# Altium PCB CYUSB.PcbDoc (part 2 of 2)
Units mm, origin at the board's own origin, x right, y up, seen from the top; angles counter-clockwise.
Board outline 36.49 x 50.37 mm, 4 copper layers (Top Layer, Internal Plane 1, Signal Layer 1, Bottom Layer), stack 0.778 mm thick; 127 components, 177 nets, 911 pads, 528 vias.
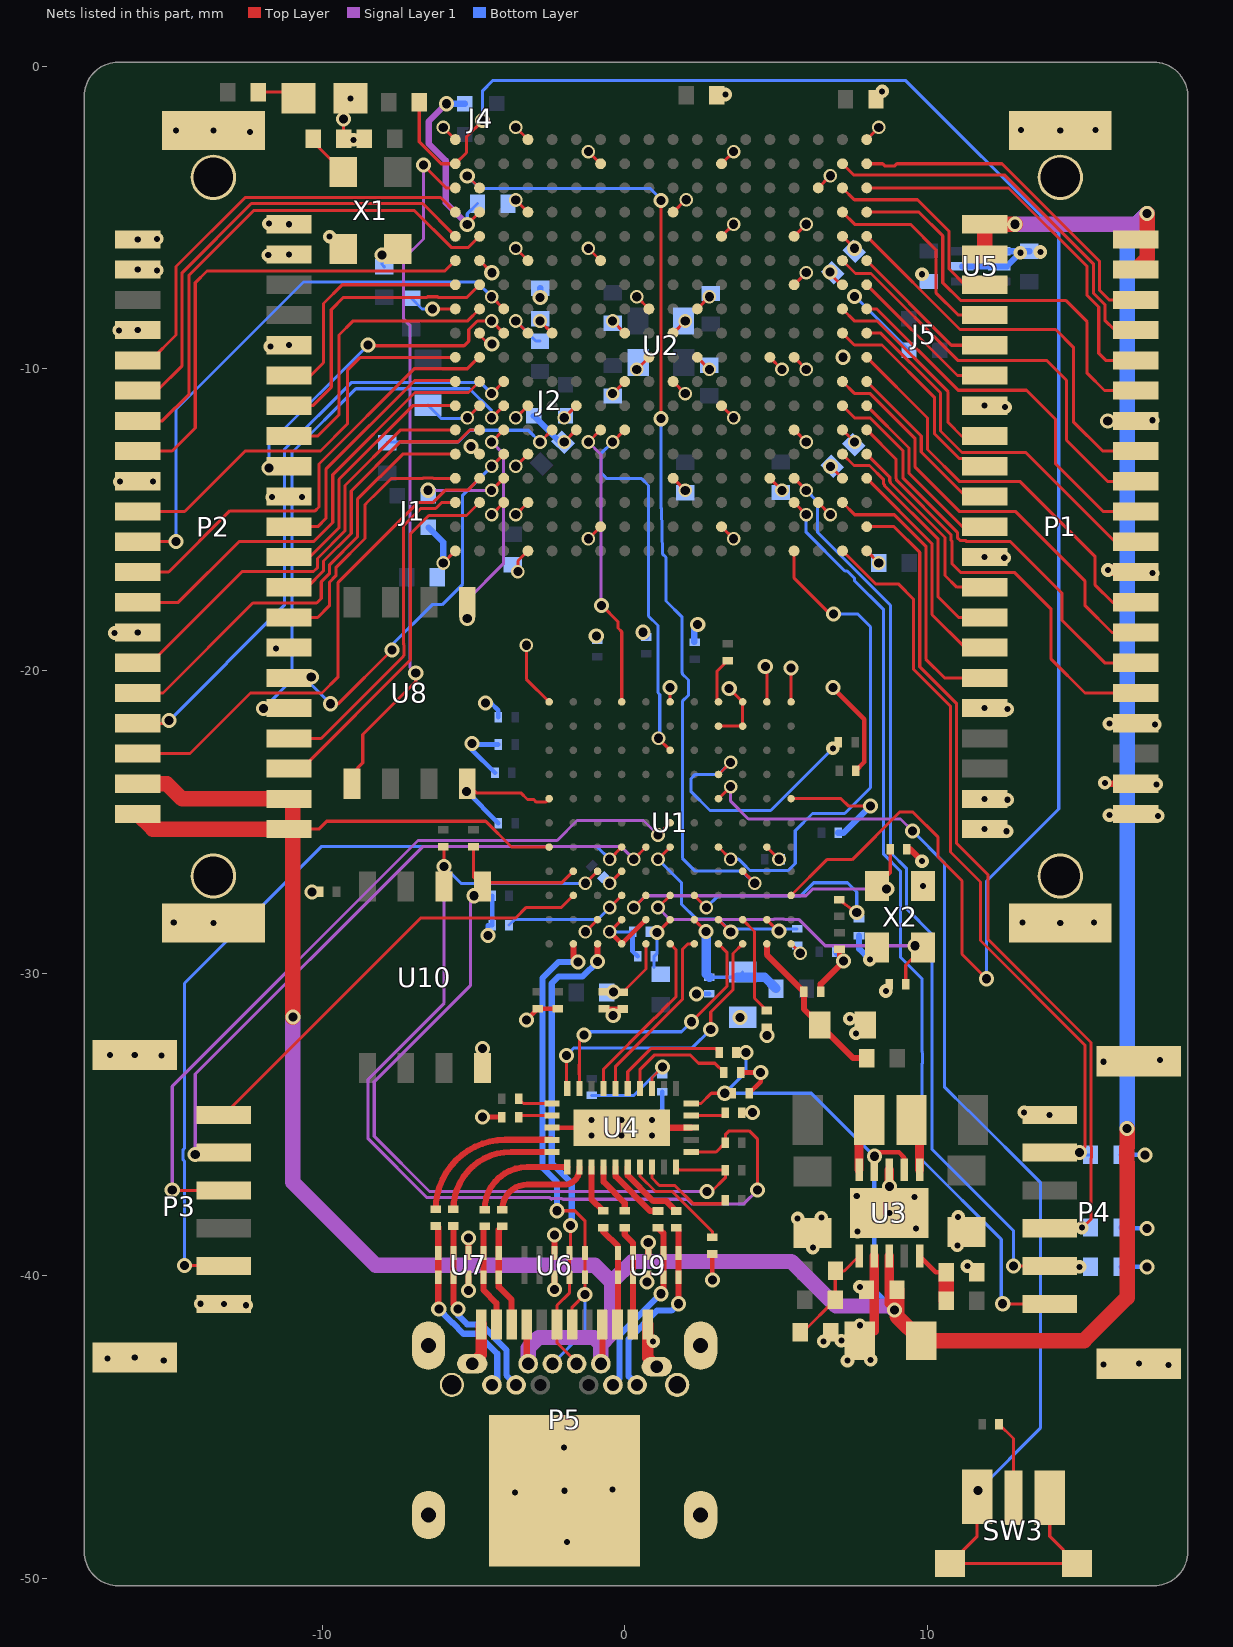
[diagram p4: the nets of this part, all layers, seen from the top]

## Via types
v1: diameter 0.45, hole 0.305, Top Layer to Bottom Layer, 248 vias
v2: diameter 0.5, hole 0.3, Top Layer to Bottom Layer, 169 vias
v3: diameter 0.45, hole 0.2, Top Layer to Bottom Layer, 111 vias

## Nets (pads, with @x,y where several pads share a name; then routed paths per layer and width w, separated by ;. In a path a pad name is that pad's centre, name@x,y a point inside that pad or via, vN(x,y) a via of type N, cw(c..) or ccw(c..) an arc to the next point about the centre after c; other vN are vias at no path point) (continued)
DQ31: U1.E4 U2.D18 | length 16.5
  Top Layer w0.102: U1.E4@3.1,-25.821 v1(3.5,-26.221) ; U2.D18@5.6,-16.029 5.6,-16.93 6.78,-18.11 v2(6.909,-18.11)
  Bottom Layer w0.102: v1(3.5,-26.221) 3.768,-26.221 3.923,-26.376 ; 3.923,-26.378 4.144,-26.599 5.405,-26.599 5.639,-26.365 5.639,-25.281 6.206,-24.714 7.271,-24.714 8.128,-23.857 8.128,-18.542 7.696,-18.11 v2(6.909,-18.11)
FLASH_CS: U2.V3 U8.1 | length 23.1
  Top Layer w0.102: U8.1@-9.017,-23.726 -9.017,-23.393 -8.661,-23.038 -8.661,-22.098 -6.909,-20.345 v2(-6.909,-20.066) ; v2(-6.655,-3.277) -5.902,-4.029 U2.V3@-5.6,-4.029
  Signal Layer 1 w0.102: v2(-6.909,-20.066) -7.106,-19.869 -7.106,-8.566 -7.315,-8.357 -7.315,-6.375 -6.655,-5.715 v2(-6.655,-3.277)
FLASH_DI: U2.T13 U8.5 | length 7.1
  Top Layer w0.102: v1(-4.4,-12.429) U2.T13@-4,-12.029
  Signal Layer 1 w0.102: v2(-5.207,-18.263) -5.207,-17.653 -4.013,-16.459 -4.013,-12.816 v1(-4.4,-12.429)
GND: C1.1 C10.2 C12.1 C13.1 C14.1 C15.1 C16.1 C17.1 C18.1 C19.1 C20.1 C21.1 C22.1 C23.1 C24.1 C25.1 C26.1 C27.1 C28.1 C29.1 C30.1 C31.1 C32.1 C33.1 C34.1 C35.1 C36.1 C37.1 C38.1 C39.1 C40.1 C41.2 C53.1 C54.1 C55.1 C56.1 C68.1 C71.2 C76.2 C79.2 C81.2 C87.2 C88.2 C89.2 C90.2 C91.2 C92.2 C93.2 C94.2 C95.2 C96.2 C97.2 C98.2 C99.2 C100.2 C101.2 J1.3 J2.3 LED1.2 P1.0 P1.7 P1.12 P1.17 P1.20 P1.21 P1.22 P1.23 P1.25 P1.30 P1.35 P2.0 P2.7 P2.12 P2.17 P2.20 P2.21 P2.22 P2.23 P2.25 P2.30 P2.35 P3.0 P3.6 P4.0 P4.6 P5.0 P5.1 P5.12 P5.B1 P5.B12 R2.2 R3.2 R6.1 R7.1 R8.1 R9.1 R12.2 R14.2 R15.2 R16.2 R19.2 R24.1 R33.2 R89.2 U1.A1 U1.A8 U1.B7 U1.B8 U1.B9 U1.D8 U1.E2 U1.G1 U1.G11 U1.K3 U1.K4 U1.L1 U1.L2 U1.L3 U1.L6 U1.L11 U2.A1 U2.A18 U2.B7 U2.B13 U2.C3 U2.C16 U2.D5 U2.D10 U2.E15 U2.G2 U2.G5 U2.G12 U2.G17 U2.H8 U2.H10 U2.J4 U2.J9 U2.J11 U2.J15 U2.K8 U2.K10 U2.L9 U2.L11 U2.M2 U2.M6 U2.M17 U2.N13 U2.R1 U2.R4 U2.R9 U2.R14 U2.R16 U2.R18 U2.T16 U2.U6 U2.U12 U2.V1 U2.V18 U3.2 U3.8 U3.11 U4.0 U4.13 U4.28 U5.2 U5.4 U5.5 U6.3 U6.8 U7.3 U7.8 U8.4 U9.3 U9.8 U10.4 X1.2 X2.2 X2.4 | length 92.7
  Top Layer w0.102: R89.2@-9.292,-2.4 v2(-9.292,-1.753) -9.292,-1.291 v3(-9.068,-1.067) ; v1(-6,-16.429) U2.V18@-5.6,-16.029 ; v1(-6,-2.029) U2.V1@-5.6,-2.429 ; U8.4@-5.207,-23.726 -4.905,-24.028 -3.439,-24.028 -3.216,-24.251 -3.007,-24.251 -2.921,-24.337 -2.614,-24.337 U1.G11@-2.498,-24.222 ; v1(-5.2,-11.629) U2.U12@-4.8,-11.229 ; U2.U6@-4.8,-6.429 -4.798,-6.429 v2(-4.394,-6.833) ; v1(-4.4,-14.829) U2.T16@-4,-14.429 ; v1(-3.6,-14.829) U2.R16@-3.2,-14.429 ; v1(-3.6,-13.229) U2.R14@-3.2,-12.829 ; v1(-3.6,-8.429) U2.R9@-3.2,-8.829 ; v1(-3.6,-4.429) U2.R4@-3.2,-4.829 ; v1(-3.6,-2.029) U2.R1@-3.2,-2.429 ; v1(-3.531,-16.713) -3.531,-16.36 U2.R18@-3.2,-16.029 ; v1(-3.251,-19.152) -3.251,-20.269 U1.L11@-2.498,-21.022 ; v1(-2,-12.429) U2.N13@-1.6,-12.029 ; v1(-1.299,-28.621) U1.B9@-0.899,-28.221 ; v1(-1.2,-15.629) U2.M17@-0.8,-15.229 ; v1(-1.2,-6.029) U2.M6@-0.8,-6.429 ; v1(-1.2,-2.829) U2.M2@-0.8,-3.229 ; v1(-0.499,-28.621) U1.B8@-0.099,-28.221 ; v1(-0.499,-27.021) U1.D8@-0.099,-26.621 ; v1(-0.4,-10.829) U2.L11@0,-10.429 ; v1(-0.4,-8.429) U2.L9@0,-8.829 ; v1(0.4,-10.029) U2.K10@0.8,-9.629 ; v1(0.4,-7.629) U2.K8@0.8,-8.029 ; U1.L6@1.501,-21.022 v2(1.501,-20.551) ; U2.J15@1.6,-13.629 v1(2,-14.029) ; U2.J11@1.6,-10.429 v1(2,-10.829) ; U2.J9@1.6,-8.829 v1(2,-8.429) ; U2.J4@1.6,-4.829 2.009,-4.42 v1(2.032,-4.42) ; U2.H10@2.4,-9.629 v1(2.8,-10.029) ; U2.H8@2.4,-8.029 v1(2.8,-7.629) ; U1.K4@3.1,-21.822 U1.K3@3.9,-21.822 U1.L3@3.9,-21.022 ; U2.G17@3.2,-15.229 v1(3.6,-15.629) ; U2.G12@3.2,-11.229 v1(3.6,-11.629) ; U2.G5@3.2,-5.629 v1(3.6,-5.229) ; U2.G2@3.2,-3.229 v1(3.6,-2.829) ; v2(3.454,-20.576) U1.L3@3.9,-21.022 ; U1.L3@3.922,-21 U1.L3@3.9,-21.022 ; v2(4.648,-19.848) 4.7,-19.9 U1.L2@4.7,-21.022 U1.L2@4.722,-21 ; U1.E2@4.7,-25.821 v1(5.1,-26.221) ; U2.E15@4.8,-13.629 v1(5.2,-14.029) ; U1.A1@5.5,-29.021 v1@5.908,-29.429 ; U1.G1@5.5,-24.222 7.153,-24.222 7.391,-24.46 v2(8.128,-24.46) ; v2(5.5,-19.9) U1.L1@5.5,-21.022 U1.L1@5.522,-21 ; U2.D10@5.6,-9.629 v1(6,-10.029) ; U2.D5@5.6,-5.629 v1(6,-5.229) ; v1(5.8,-29.329) v1@5.808,-29.329 ; U2.C16@6.4,-14.429 v1(6.8,-14.829) ; U2.C3@6.4,-4.029 v1(6.8,-3.629) ; v2(6.782,-6.807) 6.782,-6.858 7.153,-7.229 U2.B7@7.2,-7.229 ; U2.B13@7.2,-12.029 v1(7.6,-12.429) ; U2.A18@8,-16.029 v1(8.4,-16.429) ; U2.A1@8,-2.429 v1(8.4,-2.029) ; v2(15.971,-11.729) P1.35@16.9,-11.729
  Top Layer w0.152: v2(-4.699,-34.747) R8.1@-4.06,-34.747 ; U10.4@-4.699,-33.124 v2(-4.699,-32.487) ; v2(-3.251,-31.542) C19.1@-2.87,-31.161 C28.1@-2.21,-31.161 ; U4.13@-2.4,-35.1 U4.0@-0.1,-35.1 ; C30.1@-0.686,-31.161 v2@-0.381,-31.161 ; v1(-0.499,-28.621) U1.A8@-0.099,-29.021 U1.B7@0.701,-28.221 ; v2(-0.381,-31.394) v2@-0.381,-31.161 ; C29.1@-0.083,-31.161 v2@-0.381,-31.161 ; v2(2.9,-40.136) R6.1@2.9,-39.275 ; R7.1@3.831,-33.274 v2(4.496,-33.274) 4.496,-33.574 C13.1@4.11,-33.96 ; R9.1@3.875,-34.6 v2(4.222,-34.6) ; v2(4.7,-32.056) R15.2@4.7,-31.775 ; v2(6.883,-20.549) 7.925,-21.59 7.925,-23.008 C16.1@7.641,-23.292 ; v2@7.1,-29.452 C37.1@7.1,-29.204
  Top Layer w0.203: v2(-10.338,-27.305) C12.1@-10.079,-27.305 ; v2(-5.165,-40.479) U7.8@-5.165,-40.04 ; U7.3@-5.165,-39.24 v2(-5.165,-38.744) ; v2(-2.32,-40.445) U6.8@-2.32,-40.04 ; U6.3@-2.32,-39.24 v2(-2.32,-38.65) ; U4.0@-0.1,-35.1 U4.28@2.2,-35.1 ; v2@0.584,-18.694 v2(0.61,-18.72) ; v2(0.732,-40.2) 0.732,-40.09 0.73,-40.089 U9.8@0.779,-40.04 ; U9.3@0.779,-39.24 v2(0.779,-38.896) ; C34.1@6.475,-30.6 6.475,-30.355 v2(7.239,-29.591) ; C10.2@9.328,-25.893 9.434,-25.893 v3(9.83,-26.289) ; v3@15.906,-23.729 P1.23@16.9,-23.729
  Top Layer w0.305: C53.1@8.248,-41.821 U3.2@8.248,-39.344 ; v2(8.748,-37.048) U3.8@8.748,-36.493
  Top Layer w0.381: P5.B12@-5.04,-42.903 -4.74,-42.603 P5.1@-4.74,-41.603 ; P5.12@0.76,-41.603 0.76,-42.703 P5.B1@1.06,-43.003 ; v3(15.977,-16.662) P1.30@16.833,-16.662
  Signal Layer 1 w0.203: v2@0.732,-40.305 v2(0.732,-40.2)
  Bottom Layer w0.102: C71.2@-6.502,-11.215 -6.059,-11.659 -5.23,-11.659 v1(-5.2,-11.629) ; v1(-3.6,-8.429) -2.937,-9.092 C95.2@-2.8,-9.092 ; v1@-0.494,-28.626 C31.1@0.258,-28.626
  Bottom Layer w0.152: v2(-5.232,-23.978) -5.226,-23.978 C17.1@-4.175,-25.029 ; v2@-5.055,-22.602 C35.1@-4.288,-23.368 ; v2(-5.055,-22.403) -5.004,-22.403 -4.978,-22.429 C25.1@-4.175,-22.429 ; v2(-4.597,-21.057) -4.42,-21.057 -4.175,-21.301 C18.1@-4.175,-21.529 ; v2(-4.524,-28.75) -4.524,-28.4 R16.2@-4.375,-28.4 C24.1@-4.375,-27.429 ; C31.1@0.258,-28.626 0.258,-29.262 C32.1@0.425,-29.429 ; v3(0.9,-34.85) 1.245,-34.505 R24.1@1.245,-33.905 ; v2(2.37,-30.675) C39.1@2.8,-30.675 ; v2(3.815,-31.45) C38.1@3.9,-31.45 ; C20.1@6.981,-29.286 6.981,-29.333 v2(7.239,-29.591) ; R2.2@16.408,-39.7 v2(17.272,-39.7) ; R3.2@16.408,-38.4 16.438,-38.43 v2(17.272,-38.43) ; R33.2@16.408,-36 v2(17.204,-36)
  Bottom Layer w0.203: J1.3@-6.491,-15.25 -6,-15.741 v1(-6,-16.429) ; J2.3@-3.006,-11.566 C76.2@-2.143,-12.429 ; v2(-2.794,-7.645) C97.2@-2.794,-7.341 ; v2(-0.94,-18.847) -0.94,-18.953 C36.1@-0.914,-18.978 ; v2(0.61,-18.72) 0.61,-18.775 C15.1@0.711,-18.877 ; C14.1@2.3,-19.043 2.3,-18.531 2.365,-18.466 v2(2.413,-18.466) ; C22.1@7.057,-25.349 7.239,-25.349 v2(8.128,-24.46) ; C40.1@7.747,-28.748 7.747,-29.185 v3(8.103,-29.54) ; U5.2@11.154,-6.622 U5.5@12.379,-6.622 12.631,-6.622 v3(13.081,-6.172) ; U5.4@12.379,-6.122 C26.1@13.38,-6.122
  other v3: -1.905,-48.793 -3.632,-47.168 -1.99,-47.103 -0.406,-47.066 -2.007,-45.669 17.983,-42.951 15.824,-42.926 17,-42.9 -15.24,-42.799 7.366,-42.799 8.128,-42.774 -17.094,-42.723 -16.2,-42.7 0.94,-42.164 6.579,-42.164 7.163,-42.139 7.772,-41.631 -12.522,-40.97 -13.25,-40.925 -14.021,-40.919 7.772,-40.361 11.328,-39.675 6.223,-39.065 10.998,-38.989 7.696,-38.532 9.627,-38.43 5.715,-38.1 6.502,-38.075 11.024,-38.049 8.748,-37.918 9.576,-37.389 7.671,-37.363 -1.1,-35.35 -0.1,-35.35 0.9,-35.35 -1.1,-34.85 -0.1,-34.85 14.05,-34.675 13.208,-34.595 15.824,-32.918 17.704,-32.868 -16.2,-32.7 -15.316,-32.715 -17.018,-32.69 7.645,-31.979 7.442,-31.496 8.636,-30.582 -13.6,-28.329 14.4,-28.329 -14.91,-28.321 13.157,-28.321 15.519,-28.321 9.866,-27.112 12.624,-25.298 11.9,-25.229 17.628,-24.79 16.027,-24.765 12.649,-24.257 11.9,-24.229 17.577,-23.749 15.875,-23.698 17.526,-21.768 16.027,-21.742 12.649,-21.26 11.9,-21.229 -11.532,-19.253 -16.866,-18.745 -16.1,-18.729 17.45,-16.764 12.548,-16.256 11.9,-16.229 -11.659,-14.249 -10.668,-14.249 -16.688,-13.741 -15.596,-13.741 17.45,-11.709 12.573,-11.278 11.9,-11.229 -11.709,-9.271 -11.1,-9.229 -16.713,-8.738 -16.1,-8.729 9.83,-6.883 -15.469,-6.756 -16.1,-6.729 -11.786,-6.248 -11.1,-6.229 13.741,-6.147 -16.1,-5.729 -15.469,-5.715 -9.754,-5.639 -11.1,-5.229 -11.76,-5.207 -8.966,-2.438 -12.395,-2.184 -14.834,-2.134 -13.6,-2.129 14.4,-2.129 13.106,-2.108 15.57,-2.108 3.327,-0.94 8.509,-0.838
IA0: P1.3 U2.B3 | length 6.8
  Top Layer w0.102: U2.B3@7.2,-4.029 7.591,-4.42 9.677,-4.42 10.719,-5.461 10.719,-6.706 11.242,-7.229 P1.3@11.9,-7.229
IA1: P1.39 U2.A2 | length 11.4
  Top Layer w0.102: U2.A2@8,-3.229 8.527,-3.229 8.596,-3.298 8.93,-3.298 8.999,-3.229 12.475,-3.229 15.697,-6.452 15.697,-7.417 16.009,-7.729 P1.39@16.9,-7.729
IA2: P1.4 U2.B4 | length 6.9
  Top Layer w0.102: U2.B4@7.2,-4.829 7.603,-5.232 9.449,-5.232 10.287,-6.071 10.287,-7.493 11.023,-8.229 P1.4@11.9,-8.229
IA3: P1.38 U2.B2 | length 12.9
  Top Layer w0.102: U2.B2@7.2,-3.229 7.578,-3.607 12.565,-3.607 15.494,-6.536 15.494,-7.501 15.875,-7.882 15.875,-8.407 16.197,-8.729 P1.38@16.9,-8.729
IA4: P1.5 U2.A6 | length 5.1
  Top Layer w0.102: U2.A6@8,-6.429 10.8,-9.229 P1.5@11.9,-9.229
IA5: P1.37 U2.A3 | length 12.7
  Top Layer w0.102: U2.A3@8,-4.029 12.69,-4.029 15.291,-6.629 15.291,-7.585 15.672,-7.966 15.672,-9.5 15.901,-9.729 P1.37@16.9,-9.729
IA6: P1.6 U2.A7 | length 5.1
  Top Layer w0.102: U2.A7@8,-7.229 11,-10.229 P1.6@11.9,-10.229
IA7: P1.36 U2.A4 | length 13.2
  Top Layer w0.102: U2.A4@8,-4.829 9.731,-4.829 10.516,-5.613 10.516,-7.163 11.1,-7.747 14.58,-7.747 15.291,-8.458 15.291,-10.16 15.86,-10.729 P1.36@16.9,-10.729
IA8: P1.8 U2.B8 | length 7
  Top Layer w0.102: U2.B8@7.2,-8.029 7.604,-8.433 8.357,-8.433 10.693,-10.77 10.693,-11.786 11.137,-12.229 P1.8@11.9,-12.229
IA9: P1.34 U2.A5 | length 13.3
  Top Layer w0.102: U2.A5@8,-5.629 11.083,-8.712 14.249,-8.712 14.834,-9.296 14.834,-11.76 15.802,-12.729 P1.34@16.9,-12.729
IA10: P1.9 U2.B9 | length 7.1
  Top Layer w0.102: U2.B9@7.2,-8.829 7.591,-9.22 8.509,-9.22 10.236,-10.947 10.236,-12.149 11.066,-12.979 P1.9@11.9,-12.979
IA11: P1.33 U2.B6 | length 13.9
  Top Layer w0.102: U2.B6@7.2,-6.429 7.629,-6.858 8.142,-6.858 11.012,-9.728 13.945,-9.728 14.605,-10.389 14.605,-12.37 15.964,-13.729 P1.33@16.9,-13.729
IA12: P1.10 U2.A11 | length 5.7
  Top Layer w0.102: U2.A11@8,-10.429 9.804,-12.233 9.804,-12.759 11.275,-14.229 P1.10@11.8,-14.229
IA13: P1.32 U2.A8 | length 12.5
  Top Layer w0.102: U2.A8@8,-8.029 8.334,-8.029 11.024,-10.719 13.284,-10.719 14.249,-11.684 14.249,-13.157 15.821,-14.729 P1.32@16.9,-14.729
IA14: P1.11 U2.A12 | length 5.3
  Top Layer w0.102: U2.A12@8,-11.229 9.398,-12.627 9.398,-13.462 P1.11@11.165,-15.229
IA15: P1.31 U2.A9 | length 11.8
  Top Layer w0.102: U2.A9@8,-8.829 8.465,-8.829 10.439,-10.803 10.439,-12.065 11.151,-12.776 13.259,-12.776 P1.31@16.212,-15.729
IA16: P1.13 U2.A14 | length 6.6
  Top Layer w0.102: U2.A14@8,-12.829 8.763,-13.592 8.763,-13.724 8.788,-13.749 8.788,-13.783 10.591,-15.586 10.591,-15.76 ; 10.592,-15.761 10.592,-16.84 10.981,-17.229 P1.13@11.9,-17.229
IA17: P1.29 U2.A10 | length 13.4
  Top Layer w0.102: U2.A10@8,-9.629 10.008,-11.637 10.008,-12.675 11.074,-13.741 13.081,-13.741 15.545,-16.205 15.545,-17.145 16.129,-17.729 P1.29@16.9,-17.729
IA18: P1.14 U2.B14 | length 8.2
  Top Layer w0.102: U2.B14@7.2,-12.829 7.579,-13.208 8.092,-13.208 8.56,-13.676 8.56,-13.808 8.585,-13.834 8.585,-13.867 10.363,-15.645 10.363,-17.551 11.041,-18.229 P1.14@11.9,-18.229
IA19: P1.28 U2.B11 | length 14.2
  Top Layer w0.102: U2.B11@7.2,-10.429 7.591,-10.82 8.104,-10.82 9.601,-12.318 9.601,-13.259 11.074,-14.732 12.929,-14.732 15.215,-17.018 15.215,-17.831 16.113,-18.729 P1.28@16.9,-18.729
IA20: P1.15 U2.A15 | length 6.9
  Top Layer w0.102: U2.A15@8,-13.629 10.16,-15.789 10.16,-18.136 P1.15@11.253,-19.229
IA21: P1.27 U2.B12 | length 14.4
  Top Layer w0.102: U2.B12@7.2,-11.229 7.604,-11.633 8.117,-11.633 9.195,-12.711 9.195,-13.614 10.998,-15.417 10.998,-15.592 11.087,-15.681 11.262,-15.681 11.303,-15.723 12.754,-15.723 14.453,-17.421 14.453,-18.313 15.868,-19.729 P1.27@16.9,-19.729
IA22: P1.16 U2.B16 | length 9.3
  Top Layer w0.102: U2.B16@7.2,-14.429 7.605,-14.834 8.915,-14.834 9.957,-15.875 9.957,-19.609 10.577,-20.229 P1.16@11.9,-20.229
IA23: P1.26 U2.A13 | length 14.4
  Top Layer w0.102: U2.A13@8,-12.029 8.966,-12.995 8.966,-13.64 8.992,-13.665 8.992,-13.699 10.794,-15.501 10.794,-15.676 10.82,-15.702 10.82,-16.459 11.1,-16.739 12.878,-16.739 14.097,-17.958 14.097,-19.609 15.217,-20.729 P1.26@16.9,-20.729
IB0: P2.3 U2.U16 | length 12.4
  Top Layer w0.102: P2.3@-11.1,-23.229 -10.681,-23.229 -7.087,-19.634 -7.087,-15.469 -6.477,-14.859 -5.23,-14.859 U2.U16@-4.8,-14.429
IB1: P2.39 U2.U15 | length 16.9
  Top Layer w0.102: P2.39@-16.1,-22.729 -14.372,-22.729 -12.37,-20.726 -10.008,-20.726 -9.474,-20.193 -9.474,-17.069 -6.831,-14.426 -6.333,-14.426 -5.929,-14.021 -5.192,-14.021 U2.U15@-4.8,-13.629
IB2: P2.4 U2.V16 | length 11.3
  Top Layer w0.102: P2.4@-11.1,-22.229 -10.037,-22.229 -7.315,-19.507 -7.315,-19.492 -7.294,-19.471 -7.294,-19.137 -7.315,-19.116 -7.315,-15.197 -6.747,-14.629 -6.249,-14.629 -6.049,-14.429 U2.V16@-5.6,-14.429
IB3: P2.38 U2.T11 | length 20
  Top Layer w0.102: P2.38@-16.1,-21.729 v2@-15.176,-21.729 ; v1(-4.4,-10.829) U2.T11@-4,-10.429
  Bottom Layer w0.102: v2(-15.062,-21.641) -11.252,-17.831 -11.252,-12.675 -9.042,-10.465 -4.764,-10.465 v1(-4.4,-10.829)
IB4: P2.5 U2.T12 | length 17.4
  Top Layer w0.102: v1(-4.4,-11.629) U2.T12@-4,-11.229
  Bottom Layer w0.102: v2(-11.938,-21.234) -10.998,-20.295 -10.998,-12.776 -8.89,-10.668 -5.131,-10.668 -4.4,-11.399 v1(-4.4,-11.629)
IB5: P2.37 U2.V14 | length 15
  Top Layer w0.102: P2.37@-16.1,-20.729 -15.268,-20.729 -12.294,-17.755 -10.185,-17.755 -10.033,-17.602 -10.033,-17.051 -9.754,-16.772 -9.754,-16.485 -8.839,-15.57 -8.839,-14.326 -7.343,-12.829 U2.V14@-5.6,-12.829
IB6: P2.6 U2.T14 | length 12.1
  Top Layer w0.102: v2(-9.728,-21.082) -9.474,-21.082 v2(-7.696,-19.304) ; v1(-4.4,-13.229) U2.T14@-4,-12.829
  Bottom Layer w0.102: v2(-10.363,-20.193) -10.363,-20.447 v2(-9.728,-21.082) ; v2(-7.696,-19.304) -7.696,-19.134 -6.367,-17.805 -6.037,-17.805 -5.359,-17.128 -5.359,-14.188 v1(-4.4,-13.229)
IB7: P2.36 U2.V13 | length 14.7
  Top Layer w0.102: P2.36@-16.1,-19.729 -15.665,-19.729 -12.649,-16.713 -10.287,-16.713 -10.16,-16.586 -10.16,-16.281 -9.246,-15.367 -9.246,-13.868 -7.406,-12.029 U2.V13@-5.6,-12.029
IB8: P2.8 U2.V15 | length 8.7
  Top Layer w0.102: P2.8@-11.1,-18.229 -10.152,-18.229 -9.754,-17.831 -9.754,-17.059 -9.55,-16.856 -9.55,-16.586 -8.585,-15.621 -8.585,-14.503 -8.556,-14.474 -8.556,-14.464 -8.32,-14.228 -8.31,-14.228 -7.711,-13.629 -6.675,-13.629 -6.667,-13.621 -6.333,-13.621 -6.325,-13.629 U2.V15@-5.6,-13.629
IB9: P2.34 U2.U11 | length 15.2
  Top Layer w0.102: P2.34@-16.1,-17.729 -14.757,-17.729 -12.751,-15.723 -10.287,-15.723 -9.652,-15.088 -9.652,-13.513 -6.934,-10.795 -5.166,-10.795 U2.U11@-4.8,-10.429
IB10: P2.9 U2.U13 | length 9.5
  Top Layer w0.102: P2.9@-11.1,-17.229 -10.498,-17.229 -9.957,-16.688 -9.957,-16.366 -9.042,-15.451 -9.042,-14.046 -7.417,-12.421 -5.509,-12.421 -5.118,-12.029 U2.U13@-4.8,-12.029
IB11: P2.33 U2.U10 | length 15.1
  Top Layer w0.102: P2.33@-16.1,-16.729 -15.078,-16.729 -13.056,-14.707 -10.236,-14.707 -10.109,-14.58 -10.109,-13.157 -6.96,-10.008 -5.207,-10.008 -4.828,-9.629 U2.U10@-4.8,-9.629
IB12: P2.10 U2.V12 | length 8.5
  Top Layer w0.102: P2.10@-11.1,-16.229 -10.412,-16.229 -9.449,-15.265 -9.449,-13.665 -7.013,-11.229 U2.V12@-5.6,-11.229
IB13: P2.32 U2.T8 | length 18.7
  Top Layer w0.102: P2.32@-16.1,-15.729 -16.094,-15.723 v2(-14.834,-15.723) ; v1(-4.4,-7.629) U2.T8@-4,-8.029
  Bottom Layer w0.102: v2@-14.834,-15.799 v2(-14.834,-15.723) -14.834,-11.354 -10.617,-7.137 -4.892,-7.137 v1(-4.4,-7.629)
IB14: P2.11 U2.V11 | length 8.4
  Top Layer w0.102: P2.11@-11.1,-15.229 -10.149,-15.229 -9.881,-14.961 -9.881,-13.335 -6.934,-10.389 U2.V11@-5.64,-10.389
IB15: P2.31 U2.V10 | length 13.7
  Top Layer w0.102: P2.31@-16.1,-14.729 -14.551,-14.729 -12.548,-12.725 -10.058,-12.725 -9.169,-11.836 -9.169,-10.058 -8.74,-9.629 U2.V10@-5.6,-9.629
IB16: P2.13 U2.T9 | length 10.7
  Top Layer w0.102: v2(-8.484,-9.22) -8.509,-9.246 -5.309,-9.246 -5.156,-9.093 -5.156,-8.712 -4.873,-8.429 v1(-4.4,-8.429) U2.T9@-4,-8.829
  Bottom Layer w0.102: v2(-11.76,-13.284) -11.76,-12.497 v2(-8.484,-9.22)
IB17: P2.29 U2.V6 | length 15.9
  Top Layer w0.102: P2.29@-16.1,-12.729 -14.964,-12.729 -14.199,-11.963 -14.199,-7.163 -13.812,-6.777 -5.948,-6.777 U2.V6@-5.6,-6.429
IB18: P2.14 U2.U8 | length 9.6
  Top Layer w0.102: P2.14@-11.1,-12.229 -10.146,-12.229 -9.449,-11.532 -9.449,-8.89 -8.992,-8.433 -5.204,-8.433 U2.U8@-4.8,-8.029
IB19: P2.28 U2.U5 | length 17.1
  Top Layer w0.102: P2.28@-16.1,-11.729 -15.285,-11.729 -14.402,-10.846 -14.402,-6.909 -12.268,-4.775 -6.96,-4.775 -5.74,-5.994 -5.165,-5.994 U2.U5@-4.8,-5.629
IB20: P2.15 U2.U7 | length 9.5
  Top Layer w0.102: P2.15@-11.1,-11.229 -10.315,-11.229 -9.703,-10.617 -9.703,-8.052 -9.296,-7.645 -6.535,-7.645 -6.517,-7.627 -6.183,-7.627 -6.165,-7.645 -5.216,-7.645 U2.U7@-4.8,-7.229
IB21: P2.27 U2.V5 | length 14.7
  Top Layer w0.102: P2.27@-15.453,-10.729 -14.63,-9.906 -14.63,-6.833 -12.344,-4.547 -6.682,-4.547 U2.V5@-5.6,-5.629
IB22: P2.16 U2.V7 | length 7.2
  Top Layer w0.102: P2.16@-10.381,-10.229 -9.957,-9.804 -9.957,-7.849 -9.337,-7.229 U2.V7@-5.6,-7.229
IB23: P2.26 U2.V4 | length 13.8
  Top Layer w0.102: P2.26@-15.673,-9.729 -14.834,-8.89 -14.834,-6.629 -12.548,-4.343 -6.086,-4.343 U2.V4@-5.6,-4.829
INIT_B: U1.D3 U2.U3 | length 32.9
  Top Layer w0.102: v2(-5.207,-3.632) -5.197,-3.632 U2.U3@-4.8,-4.029 ; v2(1.194,-11.659) v2(1.194,-4.445) ; U1.D3@3.9,-26.621 v1(4.3,-27.021)
  Bottom Layer w0.102: v2(-5.207,-3.632) -4.788,-4.052 0.851,-4.052 v2@1.245,-4.445 ; v2(1.194,-11.659) 1.194,-14.608 1.219,-14.634 1.245,-16.121 1.364,-16.241 1.364,-17.686 1.898,-18.22 1.898,-20.067 1.905,-20.074 1.905,-20.099 2.106,-20.3 2.106,-20.802 1.905,-21.003 1.905,-26.187 2.337,-26.619 3.877,-26.619 4.06,-26.802 4.081,-26.802 v1(4.3,-27.021)
INT_CYUSB: U1.L8 U2.M13 | length 9.8
  Top Layer w0.102: v1(-1.2,-12.429) U2.M13@-0.8,-12.029 ; v2(-0.762,-17.831) -0.225,-18.368 -0.225,-18.579 -0.099,-18.705 U1.L8@-0.099,-21.022
  Signal Layer 1 w0.102: v1(-1.2,-12.429) -0.787,-12.842 v2@-0.787,-18.009
NetC1_2: C1.2 U1.C6 X2.3 | length 11.1
  Top Layer w0.102: v1(1.101,-27.821) U1.C6@1.501,-27.421 ; C1.2@9.292,-30.353 9.292,-29.718 X2.3@9.866,-29.144
  Signal Layer 1 w0.102: v1(1.101,-27.821) 1.499,-28.219 2.516,-28.219 2.526,-28.21 2.859,-28.21 2.868,-28.219 4.917,-28.219 4.939,-28.198 5.272,-28.198 5.293,-28.219 5.766,-28.219 6.629,-29.083 v2(9.601,-29.083)
NetC2_2: C2.2 U4.20 | length 2.2
  Top Layer w0.203: U4.20@-0.3,-36.4 -0.3,-36.708 0.846,-37.854 C2.2@1.1,-37.854
NetC3_2: C3.2 U4.19 | length 1.7
  Top Layer w0.203: U4.19@-0.7,-36.4 -0.7,-36.892 0,-37.592 C3.2@0,-37.85
NetC4_2: C4.2 U4.18 | length 1.6
  Top Layer w0.203: U4.18@-1.1,-36.4 -1.1,-37.462 C4.2@-0.711,-37.85
NetC5_2: C5.2 U4.17 | length 3.4
  Top Layer w0.203: C5.2@-4.049,-37.81 cw(c-3.221,-37.81) -3.221,-36.982 -2.007,-36.982 ccw(c-2.007,-36.476) -1.5,-36.476 U4.17@-1.5,-36.4
NetC6_2: C6.2 U4.16 | length 3.5
  Top Layer w0.203: C6.2@-4.633,-37.81 cw(c-3.223,-37.81) -3.223,-36.4 U4.16@-1.9,-36.4
NetC7_1: C7.1 R1.1 R14.1 U3.1 | length 3.5
  Top Layer w0.102: R14.1@5.885,-41.855 5.894,-41.855 R1.1@6.961,-40.789 6.961,-39.846 C7.1@6.971,-39.836 7.256,-39.836 U3.1@7.748,-39.344
NetC8_2: C8.2 U4.15 | length 4.3
  Top Layer w0.203: C8.2@-5.664,-37.8 cw(c-3.765,-37.8) -3.765,-35.9 U4.15@-2.4,-35.9
NetC9_2: C9.2 U4.14 | length 5.2
  Top Layer w0.203: C9.2@-6.248,-37.8 cw(c-3.949,-37.8) -3.949,-35.5 U4.14@-2.4,-35.5
NetC10_1: C10.1 U1.C7 X2.1 | length 10.6
  Top Layer w0.102: v1(0.301,-27.821) U1.C7@0.701,-27.421 ; X2.1@8.342,-27.112 8.778,-26.676 C10.1@8.778,-25.893
  Signal Layer 1 w0.102: v1(0.301,-27.821) 0.69,-27.432 5.994,-27.432 6.223,-27.203 v2(8.661,-27.203)
NetC11_2: C11.2 U4.21 | length 2.4
  Top Layer w0.203: U4.21@0.1,-36.4 0.1,-36.677 0.949,-37.526 1.372,-37.526 C11.2@1.7,-37.854
NetC29_2: C29.2 C30.2 R17.1 U1.A7 | length 2.5
  Top Layer w0.102: C30.2@-0.686,-30.611 v2(-0.371,-30.611) -0.056,-30.611 0.701,-29.854 U1.A7@0.701,-29.021
NetC31_2: C31.2 C32.2 R29.2 U1.B6 | length 1.8
  Top Layer w0.102: v2(1.07,-28.651) U1.B6@1.501,-28.221
  Bottom Layer w0.102: R29.2@0.975,-29.804 C32.2@0.975,-29.429 1.07,-29.334 v2(1.07,-28.651)
NetC33_2: C33.2 C34.2 R30.1 U1.A2 | length 5.4
  Top Layer w0.203: U1.A2@4.7,-29.021 4.7,-29.375 C34.2@5.925,-30.6 5.925,-31.175 C33.2@6.45,-31.7 7.55,-32.8 R30.1@8,-32.8
NetC38_2: C38.2 C39.2 R31.1 U1.B5 | length 4.7
  Top Layer w0.102: U1.B5@2.301,-28.221 v2(2.692,-28.613)
  Bottom Layer w0.102: C39.2@2.8,-30.125 3.725,-30.125 C38.2@3.9,-29.95
  Bottom Layer w0.305: v2(2.692,-28.613) 2.692,-30.017 C39.2@2.8,-30.125 ; C38.2@3.725,-30.125 4.625,-30.125 R31.1@5,-30.5
NetC40_2: C40.2 R13.1 U1.C5 | length 7.4
  Top Layer w0.102: U1.C5@2.301,-27.421 v1(2.701,-27.821) ; R13.1@7.087,-27.559 v2(7.671,-27.991)
  Bottom Layer w0.102: v1(2.701,-27.821) 3.089,-27.432 5.817,-27.432 6.248,-27 7.366,-27 7.671,-27.305 v2(7.671,-27.991)
NetC113_1: C113.1 X1.3 | length 0.4
  Bottom Layer w0.102: v2(-8.026,-6.248) -8.026,-6.561 C113.1@-7.95,-6.637
NetJ1_2: J1.2 U2.T15 | length 2.8
  Top Layer w0.102: v1(-4.4,-14.029) U2.T15@-4,-13.629
  Signal Layer 1 w0.102: v2@-6.494,-14.029 v1(-4.4,-14.029)
  Bottom Layer w0.102: J1.2@-6.5,-14.2 v2(-6.5,-14.023)
NetJ2_2: J2.2 U2.N12 | length 0.6
  Top Layer w0.102: v1(-2,-11.629) U2.N12@-1.6,-11.229
NetL17_1: L17.1 U3.6 | length 1.4
  Top Layer w0.305: U3.6@9.748,-36.493 L17.1@9.748,-35.109
NetL18_1: L18.1 U3.10 | length 1.8
  Top Layer w0.305: U3.10@7.748,-36.493 7.748,-36.169 7.744,-36.165 7.744,-35.748 7.748,-35.744 7.748,-35.184 L18.1@8.087,-34.845
NetLED1_1: LED1.1 R43.2 | length 1.1
  Top Layer w0.102: R43.2@-12.116,-0.864 LED1.1@-10.985,-0.864
NetP3_1: P3.1 U1.C10 | length 14.6
  Top Layer w0.102: P3.1@-13.25,-34.675 -6.744,-28.169 -3.607,-28.169 -3.251,-27.813 -2.091,-27.813 U1.C10@-1.699,-27.421
NetP3_2: P3.2 U1.E7 | length 21
  Top Layer w0.102: v1(0.301,-26.221) U1.E7@0.701,-25.821
  Signal Layer 1 w0.102: v2(-14.199,-35.992) -14.199,-33.325 -6.68,-25.806 -0.114,-25.806 v1(0.301,-26.221)
NetP3_3: P3.3 U1.F6 | length 25.6
  Top Layer w0.102: v2@-14.946,-37.175 P3.3@-13.25,-37.175 ; v1(1.101,-25.421) U1.F6@1.501,-25.021
  Signal Layer 1 w0.102: v2(-14.961,-37.16) -14.961,-33.731 -6.833,-25.603 -2.235,-25.603 -1.575,-24.943 0.622,-24.943 v1(1.101,-25.421)
NetP3_5: P3.5 U1.E8 | length 27.3
  Top Layer w0.102: v2(-14.554,-39.649) P3.5@-13.276,-39.649 ; v1(-0.499,-26.221) U1.E8@-0.099,-25.821
  Bottom Layer w0.102: v2(-14.554,-39.649) -14.554,-36.205 -14.601,-36.158 -14.601,-35.825 -14.554,-35.778 -14.554,-30.328 -10.033,-25.806 -0.914,-25.806 v1(-0.499,-26.221)
NetP5_6: P5.6 P5.B6 U1.A9 U6.2 | length 15.7
  Top Layer w0.102: U6.2@-1.82,-39.24 U6.2@-1.82,-40.04 -1.82,-40.555 -2.24,-40.975 P5.6@-2.24,-41.603 -2.24,-42.21 -1.59,-42.86 P5.B6@-1.59,-42.903 ; U6.2@-1.791,-39.243 v2(-1.791,-38.329)
  Top Layer w0.203: v2(-0.899,-29.607) U1.A9@-0.899,-29.021
  Signal Layer 1 w0.102: v2@-1.791,-38.341 v2(-1.791,-38.329)
  Bottom Layer w0.203: v2(-1.791,-38.329) -1.753,-38.291 -1.753,-36.932 -2.413,-36.271 -2.413,-30.328 -2.184,-30.099 -1.391,-30.099 v2(-0.899,-29.607)
NetP5_7: P5.7 P5.B7 U1.A10 U6.1 | length 17.3
  Top Layer w0.102: v2(-2.235,-37.846) -1.651,-37.846 -1.32,-38.177 U6.1@-1.32,-39.24 U6.1@-1.32,-40.04 v2(-1.32,-40.614) -1.74,-41.034 P5.7@-1.74,-41.603 ; v2@-1.699,-29.467 v2(-1.549,-29.616)
  Top Layer w0.203: v2@-1.699,-29.467 U1.A10@-1.699,-29.021
  Bottom Layer w0.102: P5.B7@-2.39,-42.903 -1.32,-41.833 v2(-1.32,-40.614)
  Bottom Layer w0.203: v2(-2.235,-37.846) -2.235,-36.906 -2.718,-36.424 -2.718,-30.15 -2.184,-29.616 v2(-1.549,-29.616)
NetR4_1: R4.1 R21.1 U1.D9 U4.26 U10.6 | length 35.2
  Top Layer w0.102: U10.6@-5.969,-27.124 R4.1@-5.969,-25.835 ; v1(-1.299,-27.021) U1.D9@-0.899,-26.621 ; U4.26@2.2,-35.9 3.025,-35.9 R21.1@3.325,-35.6 3.325,-35.334 3.454,-35.204 4.115,-35.204 4.394,-35.484 v2(4.394,-37.16)
  Signal Layer 1 w0.102: v2(-5.969,-26.467) -5.969,-30.98 -8.484,-33.495 -8.484,-35.466 -6.536,-37.414 -2.474,-37.414 -2.423,-37.465 -2.402,-37.444 -2.069,-37.444 -2.047,-37.465 2.057,-37.465 2.21,-37.617 3.937,-37.617 v2(4.394,-37.16)
  Bottom Layer w0.102: v2(-5.969,-26.467) -5.415,-27.021 -3.714,-27.021 -3.712,-27.019 -3.378,-27.019 -3.376,-27.021 v1(-1.299,-27.021)
NetR5_1: R5.1 R24.2 U4.3 | length 3.6
  Top Layer w0.102: U4.3@0.9,-33.8 0.9,-33.441 v2(1.245,-33.096)
  Bottom Layer w0.102: R5.1@-1.092,-34.032 0.309,-34.032 v2(1.245,-33.096)
NetR6_2: R6.2 U4.22 | length 3.6
  Top Layer w0.102: U4.22@0.5,-36.4 0.5,-36.695 1.016,-37.211 1.575,-37.211 2.9,-38.536 R6.2@2.9,-38.725
NetR7_2: R7.2 U4.4 | length 3.8
  Top Layer w0.102: U4.4@0.5,-33.8 0.5,-33.18 0.991,-32.69 2.159,-32.69 2.438,-32.969 2.976,-32.969 R7.2@3.281,-33.274
NetR8_2: R8.2 U4.12 | length 1.1
  Top Layer w0.102: R8.2@-3.462,-34.7 U4.12@-2.4,-34.7
NetR9_2: R9.2 U4.29 | length 1.2
  Top Layer w0.102: U4.29@2.2,-34.7 3.225,-34.7 R9.2@3.325,-34.6
NetR11_1: R11.1 R12.1 U3.5 | length 2
  Top Layer w0.152: U3.5@9.748,-39.344 10.278,-39.874 R12.1@10.635,-39.874
  Top Layer w0.508: R11.1@10.635,-40.814 R12.1@10.635,-39.874
NetR15_1: R15.1 U1.B3 | length 3.3
  Top Layer w0.102: U1.B3@3.9,-28.221 4.293,-28.613 4.293,-30.818 R15.1@4.7,-31.225
NetR16_1: R16.1 U1.C8 | length 4.1
  Top Layer w0.102: v1(-0.499,-27.821) U1.C8@-0.099,-27.421
  Bottom Layer w0.102: R16.1@-3.825,-28.4 -3.644,-28.219 -0.897,-28.219 v1(-0.499,-27.821)
NetR18_1: R18.1 R20.1 U1.D10 U4.25 U10.5 | length 28.2
  Top Layer w0.102: R18.1@-5,-25.804 -5,-26.823 U10.5@-4.699,-27.124 ; U10.5@-4.466,-27 -2.078,-27 U1.D10@-1.699,-26.621 ; U4.25@1.7,-36.4 1.8,-36.5 R20.1@3.325,-36.5 3.325,-36.756 2.87,-37.211 v2(2.718,-37.211)
  Signal Layer 1 w0.102: v2(-4.978,-27.432) -5.105,-27.559 -5.105,-30.404 -8.28,-33.579 -8.28,-35.382 -6.452,-37.211 v2(2.718,-37.211)
NetR19_1: R19.1 U1.B2 U1.B4 U1.E6 | length 7.7
  Top Layer w0.102: v1(1.101,-26.221) U1.E6@1.501,-25.821 ; U1.B4@3.1,-28.221 v2(3.505,-28.625) ; U1.B2@4.7,-28.221 5.105,-28.626 v2(5.105,-28.6)
  Bottom Layer w0.102: v1(1.101,-26.221) 1.88,-27 1.88,-27.711 2.362,-28.194 2.54,-28.194 2.544,-28.198 2.857,-28.198 2.861,-28.194 3.074,-28.194 v2(3.505,-28.625) ; v2@3.606,-28.525 R19.1@5.7,-28.525
NetR22_1: R22.1 U4.23 | length 3.2
  Top Layer w0.102: U4.23@0.9,-36.4 0.9,-36.765 1.143,-37.008 1.659,-37.008 2.265,-37.613 2.946,-37.613 3.212,-37.613 R22.1@3.325,-37.5
NetR23_2: R23.2 U4.11 | length 1.2
  Top Layer w0.102: R23.2@-3.51,-34.138 -3.347,-34.3 U4.11@-2.4,-34.3
NetR25_1: R25.1 U4.5 | length 3.9
  Top Layer w0.102: U4.5@0.1,-33.8 0.1,-33.25 0.864,-32.487 3.002,-32.487 R25.1@3.129,-32.614
NetR26_2: R26.2 SW3.2 | length 2.6
  Top Layer w0.102: R26.2@12.375,-44.9 12.851,-45.376 SW3.2@12.851,-47.333
NetR27_2: R27.2 U1.H4 | length 8.3
  Top Layer w0.102: U1.H4@3.1,-23.422 v1(3.5,-23.022)
  Bottom Layer w0.102: v1(3.5,-23.022) 3.103,-23.419 2.337,-23.419 2.184,-23.571 2.184,-23.978 2.819,-24.613 4.826,-24.613 v3(6.883,-22.555)
NetR28_2: R28.2 U1.L4 | length 1.5
  Top Layer w0.102: U1.L4@3.1,-21.022 3.052,-20.974 3.052,-20.007 R28.2@3.404,-19.655
NetR34_2: R34.2 U2.V8 | length 1.8
  Top Layer w0.102: v2@-6.5,-8.029 v2(-6.35,-8.029) U2.V8@-5.6,-8.029
  Bottom Layer w0.102: R34.2@-7.061,-7.671 -6.703,-8.029 v2(-6.35,-8.029)
NetR41_1: R41.1 U2.P13 | length 5.9
  Top Layer w0.102: v1(-2.8,-12.429) U2.P13@-2.4,-12.029
  Bottom Layer w0.102: R41.1@-7.849,-12.454 -7.83,-12.436 -5.512,-12.436 -5.116,-12.04 -3.189,-12.04 v1(-2.8,-12.429)
NetR89_1: R89.1 X1.1 | length 1.5
  Top Layer w0.102: R89.1@-10.3,-2.4 -10.3,-2.508 X1.1@-9.307,-3.5
NetSW3_1: SW3.1 U1.G4 | length 41.2
  Top Layer w0.102: U1.G4@3.1,-24.222 v1(3.5,-23.822) ; SW3.1@11.651,-47.308 11.651,-48.608 SW3.1@10.751,-49.508 SW3.1@14.951,-49.508 14.051,-48.608 SW3.1@14.051,-47.333
  Signal Layer 1 w0.102: v1(3.5,-23.822) 3.5,-24.303 4.089,-24.892 9.119,-24.892 v2(9.512,-25.286)
  Bottom Layer w0.102: v2(9.512,-25.286) 10.566,-26.34 10.566,-33.747 11.347,-34.528 11.363,-34.528 13.741,-36.906 13.741,-45.034 v2(11.684,-47.092)
NetU1_A3: U1.A3 U4.10 | length 9.5
  Top Layer w0.102: v2(-1.93,-32.715) -1.93,-33.77 U4.10@-1.9,-33.8 ; v2(2.845,-31.852) 2.845,-31.275 3.581,-30.539 3.581,-29.34 U1.A3@3.9,-29.021
  Bottom Layer w0.102: v2(-1.93,-32.715) -1.676,-32.461 2.235,-32.461 v2(2.845,-31.852)
NetU1_A4: U1.A4 U4.9 | length 8.6
  Top Layer w0.102: U4.9@-1.5,-33.8 -1.5,-33.349 -1.502,-33.347 -1.502,-33.014 -1.5,-33.011 v2@-1.5,-31.955 ; v2(2.21,-31.598) 3.378,-30.429 3.378,-29.298 U1.A4@3.1,-29.021
  Bottom Layer w0.102: v2@-1.219,-31.928 1.88,-31.928 v2(2.21,-31.598)
  other v2: -1.346,-32.029
NetU1_A5: U1.A5 U4.6 | length 6
  Top Layer w0.102: U4.6@-0.3,-33.8 -0.3,-33.492 ; -0.301,-33.491 -0.301,-33.158 ; -0.3,-33.157 -0.3,-33.066 1.905,-30.861 1.905,-29.21 2.094,-29.021 U1.A5@2.301,-29.021
NetU1_A6: U1.A6 U4.7 | length 5.9
  Top Layer w0.102: U4.7@-0.7,-33.8 -0.7,-33.349 -0.698,-33.347 -0.698,-33.159 0.995,-31.467 1.005,-31.467 1.241,-31.231 1.241,-31.221 1.702,-30.759 1.702,-29.222 U1.A6@1.501,-29.021
PCLK: U1.J6 U2.L13 | length 12.6
  Top Layer w0.102: v1(-0.4,-12.429) U2.L13@0,-12.029 ; v1(1.118,-22.225) 1.118,-22.239 U1.J6@1.501,-22.622
  Bottom Layer w0.102: v1(-0.4,-12.429) -0.787,-12.816 -0.787,-13.437 -0.584,-13.64 0.559,-13.64 0.787,-13.868 0.787,-18.186 1.098,-18.497 1.098,-19.529 1.102,-19.533 1.102,-19.867 1.098,-19.871 1.098,-20.717 1.157,-20.776 1.157,-22.166 1.118,-22.205 v1(1.118,-22.225)
PROGRAM: R32.2 U1.C1 U2.V2 | length 64.2
  Top Layer w0.102: R32.2@-6.792,-1.2 -6.792,-2.504 -6.067,-3.229 U2.V2@-5.6,-3.229 -5.232,-2.861 -5.232,-2.337 v2(-4.699,-1.803) ; U1.C1@5.5,-27.421 6.683,-26.238 7.518,-26.238 9.093,-24.663 9.525,-24.663 10.363,-25.502 10.363,-26.153 11.151,-26.94 11.151,-29.362 v2(11.963,-30.175)
  Bottom Layer w0.102: v2(-4.699,-1.803) -4.699,-0.813 -4.369,-0.483 9.296,-0.483 14.351,-5.537 14.351,-24.562 11.963,-26.949 v2(11.963,-30.175)
RXN1: C8.1 P5.B10 U7.4 | length 6.2
  Top Layer w0.203: v2@-5.665,-40.944 U7.4@-5.665,-40.04 U7.4@-5.665,-39.24 C8.1@-5.665,-38.35
  Bottom Layer w0.203: v2(-5.512,-41.097) -5.512,-41.301 -5.208,-41.605 -4.751,-41.605 -3.912,-42.444 -3.912,-43.281 P5.B10@-3.59,-43.603
RXN2: C4.1 P5.10 U9.5 | length 3.4
  Top Layer w0.203: C4.1@-0.711,-38.4 -0.711,-38.532 -0.221,-39.022 U9.5@-0.221,-39.24 U9.5@-0.221,-40.04 P5.10@-0.221,-41.584
RXP1: C9.1 P5.B11 U7.5 | length 6.3
  Top Layer w0.203: v2@-6.165,-41.079 U7.5@-6.165,-40.04 U7.5@-6.165,-39.24 C9.1@-6.165,-38.391
  Bottom Layer w0.203: v2(-6.147,-41.097) -5.965,-41.279 -5.965,-41.285 -5.7,-41.55 -5.694,-41.55 -5.334,-41.91 -4.877,-41.91 -4.216,-42.57 -4.216,-43.429 P5.B11@-4.39,-43.603
RXP2: C3.1 P5.11 U9.4 | length 3.3
  Top Layer w0.203: C3.1@0,-38.4 0,-38.633 0.279,-38.912 U9.4@0.279,-39.24 U9.4@0.279,-40.04 P5.11@0.279,-41.584
TCK: P4.3 R3.1 U2.A17 | length 28
  Top Layer w0.102: U2.A17@8,-15.229 8.904,-15.229 9.754,-16.078 9.754,-19.863 10.973,-21.082 10.973,-25.705 12.014,-26.746 12.014,-28.88 15.418,-32.283 15.418,-35.728 15.439,-35.749 15.439,-36.082 15.418,-36.104 15.418,-38.125 15.118,-38.425 P4.3@14.05,-38.425
  other v3: 15.113,-38.405
TDI: P4.2 R2.1 U2.D15 | length 30.2
  Top Layer w0.102: U2.D15@5.6,-13.629 v1(6,-14.029) ; v2(12.852,-39.675) P4.2@14.05,-39.675
  Bottom Layer w0.102: v1(6,-14.029) 6.375,-14.404 6.375,-14.671 6.377,-14.673 6.377,-14.985 6.375,-14.987 6.375,-15.418 8.788,-17.831 8.788,-26.002 9.322,-26.535 9.322,-27.864 10.16,-28.702 10.16,-35.814 12.852,-38.506 v2(12.852,-39.675)
  other v3: 15.037,-39.7
TDO: P4.1 U2.D16 | length 31
  Top Layer w0.102: U2.D16@5.6,-14.429 v1(6,-14.829) ; v2(12.497,-40.919) 12.502,-40.925 P4.1@14.05,-40.925
  Bottom Layer w0.102: v1(6,-14.829) 6,-15.415 7.276,-16.692 7.355,-16.692 7.591,-16.928 7.591,-17.006 8.56,-17.975 8.56,-26.06 9.119,-26.619 9.119,-29.464 9.83,-30.175 9.83,-32.603 9.851,-32.625 9.851,-32.958 9.83,-32.979 9.83,-36.17 12.45,-38.79 12.45,-40.873 v2(12.497,-40.919)
TMS: P4.5 R33.1 U2.B18 | length 25.1
  Top Layer w0.102: U2.B18@7.2,-16.029 8.291,-17.12 9.042,-17.12 9.55,-17.628 9.55,-19.947 10.77,-21.166 10.77,-25.984 11.76,-26.975 11.76,-28.913 15.215,-32.368 15.215,-35.738 v2(15.037,-35.916) 15.027,-35.925 P4.5@14.05,-35.925
  Bottom Layer w0.102: v2(15.037,-35.916) 15.121,-36 R33.1@15.4,-36
TXN1: C5.1 P5.3 U7.1 | length 3.5
  Top Layer w0.203: C5.1@-4.049,-38.36 -4.165,-38.476 U7.1@-4.165,-39.24 U7.1@-4.165,-40.04 -4.165,-40.361 -3.74,-40.786 P5.3@-3.74,-41.603
TXN2: C2.1 P5.B3 U9.2 | length 5.7
  Top Layer w0.203: C2.1@1.1,-38.404 1.279,-38.583 U9.2@1.279,-39.24 U9.2@1.279,-40.04 1.279,-40.504 v2(1.194,-40.589)
  Bottom Layer w0.203: P5.B3@-0.178,-43.391 -0.178,-41.961 v2(1.194,-40.589)
TXP1: C6.1 P5.2 U7.2 | length 3.4
  Top Layer w0.203: C6.1@-4.665,-38.392 U7.2@-4.665,-39.24 U7.2@-4.665,-40.04 -4.665,-40.471 -4.24,-40.896 P5.2@-4.24,-41.603
TXP2: C11.1 P5.B2 U9.1 | length 6.3
  Top Layer w0.203: C11.1@1.7,-38.404 1.779,-38.483 U9.1@1.779,-39.24 U9.1@1.779,-40.04 v2(1.779,-40.92)
  Bottom Layer w0.203: P5.B2@0.41,-43.603 0.127,-43.32 0.127,-42.087 1.066,-41.148 1.551,-41.148 v2(1.779,-40.92)
VBUS: C13.2 C53.2 C55.2 P1.1 P1.2 P1.40 P1.41 P2.1 P2.2 P2.40 P2.41 P5.4 P5.9 P5.B4 P5.B9 R25.2 U1.E11 U3.3 U3.7 U3.9 U4.30 | length 134.6
  Top Layer w0.102: P2.1@-11.1,-25.229 -10.973,-25.229 -10.116,-25.229 -9.855,-24.968 -4.597,-24.968 -3.744,-25.821 U1.E11@-2.498,-25.821 ; U4.30@2.2,-34.3 2.525,-34.3 2.865,-33.96 v2(3.306,-33.96) ; R25.2@3.679,-32.614 v2(4.013,-32.614)
  Top Layer w0.152: U3.9@8.248,-36.493 8.255,-36.486 v2(8.255,-36.043) ; v2@8.382,-35.916 9.068,-35.916 9.248,-36.096 U3.7@9.248,-36.493
  Top Layer w0.203: P5.B9@-3.24,-42.853 P5.4@-3.24,-41.603 ; P5.B4@-0.74,-42.853 P5.9@-0.74,-41.603
  Top Layer w0.305: 8.748,-40.916 U3.3@8.748,-39.344
  Top Layer w0.508: P2.41@-16.1,-24.729 -15.6,-25.229 P2.1@-11.1,-25.229 ; P2.40@-16.1,-23.729 -15.133,-23.729 -14.633,-24.229 P2.2@-11.1,-24.229 ; v2(-10.973,-31.445) -10.973,-25.229 P2.2@-10.973,-24.356 ; C55.2@9.001,-40.458 9.001,-41.335 C53.2@9.804,-42.139 15.189,-42.139 16.612,-40.716 16.612,-36.264 16.598,-36.251 16.598,-35.749 16.612,-35.736 v2(16.612,-35.128) ; P1.2@11.9,-6.229 P1.1@11.9,-5.229 v2(12.907,-5.229) ; P1.40@16.9,-6.729 17.272,-6.357 v2(17.272,-4.877)
  Signal Layer 1 w0.152: v2(8.255,-36.043) v2@8.255,-35.949
  Signal Layer 1 w0.508: v2(-10.973,-31.445) -10.973,-36.906 -8.23,-39.649 -0.991,-39.649 -0.432,-40.208 ; P5.B9@-3.19,-42.903 -3.19,-42.382 -2.845,-42.037 -1.016,-42.037 -0.79,-42.263 ; P5.B4@-0.79,-42.903 -0.79,-42.263 ; v2(8.915,-41.123) 8.788,-40.996 6.985,-40.996 5.512,-39.522 0.254,-39.522 -0.432,-40.208 ; v2(12.907,-5.229) 16.92,-5.229 v2(17.272,-4.877) ; -0.79,-42.263 -0.432,-41.905 -0.432,-40.208
  Bottom Layer w0.102: v2(4.013,-32.614) 4.013,-33.253 v2(3.306,-33.96) 6.172,-33.96 v2(8.255,-36.043)
  Bottom Layer w0.152: v2(8.255,-36.043) 8.255,-40.462 v2(8.915,-41.123)
  Bottom Layer w0.508: v2(16.612,-35.128) 16.612,-5.537 v2(17.272,-4.877)
VIO0: C41.1 C81.1 J5.2 U2.B5 U2.B10 U2.B15 U2.D7 U2.D13 U2.E10 | length 5.4
  Top Layer w0.102: U2.E10@4.8,-9.629 v1(5.2,-10.029) ; U2.D13@5.6,-12.029 v1(6,-12.429) ; U2.D7@5.6,-7.229 v1(6,-6.829) ; v2(6.807,-13.236) U2.B15@7.2,-13.629 ; U2.B10@7.2,-9.629 7.202,-9.627 v2(7.214,-9.627) ; U2.B5@7.2,-5.629 v2(7.595,-6.024)
  Bottom Layer w0.102: v2(7.595,-7.62) 7.62,-7.62 J5.2@9.4,-9.4
VIO2: C92.1 C97.1 J4.2 U2.P9 U2.R6 U2.R12 U2.U4 U2.U9 U2.U14 | length 9.6
  Top Layer w0.102: v2(-5.207,-5.232) -5.203,-5.232 U2.U4@-4.8,-4.829 ; v2(-5.08,-12.573) -5.056,-12.573 U2.U14@-4.8,-12.829 ; U2.U9@-4.8,-8.829 -4.8,-8.891 -4.42,-9.271 -4.394,-9.246 v2(-4.394,-9.195) ; v1(-3.6,-11.629) U2.R12@-3.2,-11.229 ; v1(-3.6,-6.029) U2.R6@-3.2,-6.429 ; v1(-2.8,-8.429) U2.P9@-2.4,-8.829
  Signal Layer 1 w0.102: v2@-5.232,-5.258 v2(-5.207,-5.232)
  Signal Layer 1 w0.203: v2(-5.893,-1.245) -6.477,-1.829 -6.477,-2.565 -5.918,-3.124 -5.918,-4.521 v2(-5.207,-5.232)
  Bottom Layer w0.102: v2(-5.207,-5.232) -5.207,-4.885 C92.1@-4.869,-4.547 ; v2@-5.131,-12.522 v2(-5.08,-12.573)
  Bottom Layer w0.203: v2(-5.893,-1.245) J4.2@-5.283,-1.245
pads on no net: P1.18 P1.19 P1.24 P2.18 P2.19 P2.24 P5.8 P5.B8 U1.A11 U1.B11 U1.C2 U1.C4 U1.C9 U1.D2 U1.D6 U1.D7 U1.D11 U1.E10 U1.F2 U2.A16 U2.C1 U2.C2 U2.C4 U2.C5 U2.C6 U2.C7 U2.C8 U2.C9 U2.C10 U2.C11 U2.C12 U2.C13 U2.C14 U2.C15 U2.D1 U2.D2 U2.D3 U2.D4 U2.D6 U2.D8 U2.D9 U2.D11 U2.D12 U2.D14 U2.E1 U2.E3 U2.E4 U2.E6 U2.E7 U2.E8 U2.E11 U2.E12 U2.E13 U2.F1 U2.F2 U2.F3 U2.F4 U2.F5 U2.F6 U2.F7 U2.F8 U2.F9 U2.F10 U2.F11 U2.F12 U2.F13 U2.G1 U2.G3 U2.G6 U2.G8 U2.G9 U2.G11 U2.G13 U2.H1 U2.H2 U2.H3 U2.H4 U2.H5 U2.H6 U2.H7 U2.H12 U2.H13 U2.H18 U2.J1 U2.J3 U2.J6 U2.J7 U2.J13 U2.K1 U2.K2 U2.K3 U2.K4 U2.K5 U2.K6 U2.K12 U2.K13 U2.L1 U2.L2 U2.L3 U2.L4 U2.L5 U2.L6 U2.L7 U2.L12 U2.M1 U2.M3 U2.M5 U2.M8 U2.M10 U2.M11 U2.N1 U2.N2 U2.N3 U2.N4 U2.N5 U2.N6 U2.N7 U2.N8 U2.N9 U2.N10 U2.N11 U2.P1 U2.P2 U2.P3 U2.P4 U2.P6 U2.P7 U2.P8 U2.P11 U2.P12 U2.P16 U2.R3 U2.R5 U2.R7 U2.R8 U2.R10 U2.R11 U2.T1 U2.T2 U2.T3 U2.T4 U2.T5 U2.T6 U2.T7 U2.T10 U2.U1 U2.U2 U4.24 U4.27 U10.1 U10.2 U10.3 U10.7
copper on no net: | length 53
  Top Layer w0.102: v1(-4.4,-10.029) -4,-9.629 ; v1(-4.4,-6.029) -4,-6.429 ; v1(-4.4,-5.229) -4,-5.629 ; v1(-4.4,-3.629) -4,-4.029 ; v1(-3.6,-10.829) -3.2,-10.429 ; v1(-3.6,-10.029) -3.2,-9.629 ; v1(-3.6,-7.629) -3.2,-8.029 ; v1(-3.6,-6.829) -3.2,-7.229 ; v1(-3.6,-5.229) -3.2,-5.629 ; v1(-3.6,-3.629) -3.2,-4.029 ; v1(-2.8,-14.829) -2.4,-14.429 ; v1(-2.8,-10.829) -2.4,-10.429 ; v1(-2.8,-6.029) -2.4,-6.429 ; v1(-2,-8.429) -1.6,-8.829 ; v1(-2,-7.629) -1.6,-8.029 ; v1(-2,-6.829) -1.6,-7.229 ; v1(-2,-6.029) -1.6,-6.429 ; v1(-2,-5.229) -1.6,-5.629 ; v1(-2,-3.629) -1.6,-4.029 ; v1(-1.299,-27.821) -0.899,-27.421 ; v1(-1.2,-10.029) -0.8,-9.629 ; v1(-1.2,-7.629) -0.8,-8.029 ; v1(-1.2,-5.229) -0.8,-5.629 ; v1(-1.2,-3.629) -0.8,-4.029 ; v1(-0.4,-6.829) 0,-7.229 ; v1(-0.4,-6.029) 0,-6.429 ; v1(-0.4,-5.229) 0,-5.629 ; v1(-0.4,-4.429) 0,-4.829 ; v1(-0.4,-3.629) 0,-4.029 ; v1(0.301,-27.021) 0.701,-26.621 ; v1(0.4,-12.429) 0.8,-12.029 ; v1(0.4,-11.629) 0.8,-11.229 ; v1(0.4,-6.029) 0.8,-6.429 ; v1(0.4,-5.229) 0.8,-5.629 ; v1(0.4,-4.429) 0.8,-4.829 ; v1(0.4,-3.629) 0.8,-4.029 ; v1(1.101,-27.021) 1.501,-26.621 ; 1.6,-12.029 v1(2,-12.429) ; 1.6,-7.229 v1(2,-6.829) ; 1.6,-6.429 v1(2,-6.029) ; 1.6,-4.029 v1(2,-3.629) ; 2.4,-16.98 2.4,-16.029 ; 2.4,-12.029 v1(2.8,-12.429) ; 2.4,-11.229 v1(2.8,-11.629) ; 2.4,-7.229 v1(2.8,-6.829) ; 2.4,-6.429 v1(2.8,-6.029) ; 2.4,-5.629 v1(2.8,-5.229) ; 2.4,-4.829 v1(2.8,-4.429) ; 2.4,-4.029 v1(2.8,-3.629) ; 3.1,-27.421 v1(3.5,-27.821) ; 3.2,-12.029 v1(3.6,-12.429) ; 3.2,-10.429 v1(3.6,-10.829) ; 3.2,-8.829 v1(3.6,-8.429) ; 3.2,-8.029 v1(3.6,-7.629) ; 3.2,-6.429 v1(3.6,-6.029) ; 3.2,-4.029 v1(3.6,-3.629) ; 4,-12.029 v1(4.4,-12.429) ; 4,-11.229 v1(4.4,-11.629) ; 4,-10.429 v1(4.4,-10.829) ; 4,-9.629 v1(4.4,-10.029) ; 4,-8.829 v1(4.4,-8.429) ; 4,-8.029 v1(4.4,-7.629) ; 4,-7.229 v1(4.4,-6.829) ; 4,-6.429 v1(4.4,-6.029) ; 4,-5.629 v1(4.4,-5.229) ; 4,-4.829 v1(4.4,-4.429) ; 4,-4.029 v1(4.4,-3.629) ; 4.8,-12.029 v1(5.2,-12.429) ; 4.8,-11.229 v1(5.2,-11.629) ; 4.8,-10.429 v1(5.2,-10.829) ; 4.8,-8.029 v1(5.2,-7.629) ; 4.8,-7.229 v1(5.2,-6.829) ; 4.8,-6.429 v1(5.2,-6.029) ; 4.8,-4.829 v1(5.2,-4.429) ; 4.8,-4.029 v1(5.2,-3.629) ; 5.6,-12.829 v1(6,-13.229) ; 5.6,-11.229 v1(6,-11.629) ; 5.6,-10.429 v1(6,-10.829) ; 5.6,-8.829 v1(6,-8.429) ; 5.6,-8.029 v1(6,-7.629) ; 5.6,-6.429 v1(6,-6.029) ; 5.6,-4.829 v1(6,-4.429) ; 5.6,-4.029 v1(6,-3.629) ; 6.4,-13.629 v1(6.8,-14.029) ; 6.4,-12.029 v1(6.8,-12.429) ; 6.4,-11.229 v1(6.8,-11.629) ; 6.4,-10.429 v1(6.8,-10.829) ; 6.4,-9.629 v1(6.8,-10.029) ; 6.4,-8.829 v1(6.8,-8.429) ; 6.4,-8.029 v1(6.8,-7.629) ; 6.4,-6.429 v1(6.8,-6.029) ; 6.4,-5.629 v1(6.8,-5.229) ; 6.4,-4.829 v1(6.8,-4.429)

## Polygon pours and split planes (outlines as drawn)
3.3D on Signal Layer 1 "3.3D_L03_P008" (solid, remove dead copper, pour order 8): -6.018,-2.057 8.382,-2.057 9.583,-3.259 9.583,-17.072 8.969,-16.457 -6.018,-16.457
VIO2 on Signal Layer 1 "VIO2_L03_P006" (solid, remove dead copper, pour order 6): -6.515,-13.429 -6.033,-12.946 -3.036,-12.946 -1.486,-11.397 -1.74,-11.143 -1.74,-7.089 -4.4,-4.429 -4.434,-4.463 -6.515,-4.463
VIO0 on Signal Layer 1 "VIO0_L03_P004" (solid, remove dead copper, pour order 4): 8.915,-5.029 8.433,-5.512 5.436,-5.512 3.886,-7.061 4.14,-7.315 4.14,-11.369 6.8,-14.029 6.834,-13.995 8.915,-13.995
3.3D on Bottom Layer "3.3D_L04_P002" (solid, remove dead copper, pour order 2): -6,-2.029 8.4,-2.029 9.601,-3.23 9.601,-17.043 8.987,-16.429 -6,-16.429
1.2 on Bottom Layer "1.2_L04_P000" (solid, remove dead copper, pour order 0): -1.626,-6.553 4.283,-6.553 3.381,-11.145 -1.626,-12.057
GND on Internal Plane 1 (split plane): 18.108,-0.945 18.106,-0.932
GND on Internal Plane 1 (split plane): 17.587,-0.389 17.682,-0.412 17.772,-0.449 17.854,-0.499 17.928,-0.562 17.991,-0.636 18.042,-0.719 18.079,-0.809 18.102,-0.903 18.103,-0.917 18.076,-0.917 18.108,-0.994 18.108,-49.116 18.108,-49.117 18.108,-49.12 18.109,-49.128 18.102,-49.214 18.079,-49.308 18.042,-49.398 17.991,-49.481 17.928,-49.555 17.854,-49.618 17.772,-49.669 17.682,-49.706 17.587,-49.728 17.501,-49.735 17.491,-49.734 -16.742,-49.734 -16.743,-49.734 -16.745,-49.734 -16.743,-49.734 -16.743,-49.702 -16.745,-49.704 -16.745,-49.734 -16.753,-49.735 -16.839,-49.728 -16.934,-49.706 -17.024,-49.669 -17.106,-49.618 -17.18,-49.555 -17.243,-49.481 -17.294,-49.398 -17.331,-49.308 -17.354,-49.214 -17.361,-49.128 -17.36,-49.117 -17.36,-1.001 -17.36,-1 -17.328,-1 -17.329,-0.997 -17.36,-0.998 -17.36,-1 -17.36,-0.998 -17.361,-0.99 -17.354,-0.903 -17.331,-0.809 -17.294,-0.719 -17.243,-0.636 -17.18,-0.562 -17.106,-0.499 -17.024,-0.449 -16.934,-0.412 -16.839,-0.389 -16.753,-0.382 -16.743,-0.383 17.489,-0.383 17.49,-0.383 17.491,-0.383 17.496,-0.382 17.496,-0.383 17.491,-0.383 17.491,-0.415 17.496,-0.412 17.496,-0.383 17.501,-0.382

## Keep-outs
Keep-Out Layer:
  lines w0.254: 18.491,-1 ccw(c17.491,-1) 17.491,0 -16.743,0 ccw(c-16.743,-1) -17.743,-1 -17.743,-49.117 ccw(c-16.743,-49.117) -16.743,-50.117 17.491,-50.117 ccw(c17.491,-49.117) 18.491,-49.117 18.491,-0.917

## Text inside footprints (layer, text, board x,y; h text height)
U1: Top Overlay "1" at 6.2,-30.482 h0.71 r90; Top Overlay "11" at -3.706,-30.355 h0.71 r90; Top Overlay "A" at 7.343,-28.577 h0.71 r180; Top Overlay "L" at 7.216,-20.576 h0.71 r180; Mechanical 32 "G11" at -2.498,-25.075 h0.71 r180; Mechanical 32 "L11" at -2.498,-21.876 h0.71 r180; Mechanical 32 "B7" at 0.701,-28.79 h0.71 r180; Mechanical 32 "D8" at -0.099,-27.19 h0.71 r180; Mechanical 32 "B9" at -0.899,-28.79 h0.71 r180; Mechanical 32 "B8" at -0.099,-28.79 h0.71 r180; Mechanical 32 "A8" at -0.099,-29.59 h0.71 r180; Mechanical 32 "L3" at 3.9,-21.591 h0.71 r180; Mechanical 32 "K4" at 3.1,-22.391 h0.71 r180; Mechanical 32 "G1" at 5.5,-24.791 h0.71 r180; Mechanical 32 "K3" at 3.9,-22.391 h0.71 r180; Mechanical 32 "L1" at 5.5,-21.591 h0.71 r180; Mechanical 32 "L2" at 4.7,-21.591 h0.71 r180; Mechanical 32 "E2" at 4.7,-26.39 h0.71 r180; Mechanical 32 "A1" at 5.5,-29.59 h0.71 r180; Mechanical 32 "L6" at 1.501,-21.591 h0.71 r180; Mechanical 32 "B5" at 2.301,-28.79 h0.71 r180; Mechanical 32 "A2" at 4.7,-29.59 h0.71 r180; Mechanical 32 "C11" at -2.498,-28.274 h0.71 r180; Mechanical 32 "B1" at 5.5,-28.79 h0.71 r180; Mechanical 32 "C6" at 1.501,-27.99 h0.71 r180; Mechanical 32 "E6" at 1.501,-26.39 h0.71 r180; Mechanical 32 "B4" at 3.1,-28.79 h0.71 r180; Mechanical 32 "B2" at 4.7,-28.79 h0.71 r180; Mechanical 32 "C7" at 0.701,-27.99 h0.71 r180; Mechanical 32 "L4" at 3.1,-21.591 h0.71 r180; Mechanical 32 "L8" at -0.099,-21.591 h0.71 r180; Mechanical 32 "H4" at 3.1,-23.991 h0.71 r180; Mechanical 32 "G4" at 3.1,-24.791 h0.71 r180; Mechanical 32 "A3" at 3.9,-29.59 h0.71 r180; Mechanical 32 "A9" at -0.899,-29.59 h0.71 r180; Mechanical 32 "A10" at -1.699,-29.874 h0.71 r180; Mechanical 32 "A7" at 0.701,-29.59 h0.71 r180; Mechanical 32 "E11" at -2.498,-26.675 h0.71 r180; Mechanical 32 "A4" at 3.1,-29.59 h0.71 r180; Mechanical 32 "D10" at -1.699,-27.475 h0.71 r180; Mechanical 32 "D9" at -0.899,-27.19 h0.71 r180; Mechanical 32 "F11" at -2.498,-25.875 h0.71 r180; Mechanical 32 "J11" at -2.498,-23.475 h0.71 r180; Mechanical 32 "C3" at 3.9,-27.99 h0.71 r180; Mechanical 32 "H1" at 5.5,-23.991 h0.71 r180; Mechanical 32 "L5" at 2.301,-21.591 h0.71 r180; Mechanical 32 "L7" at 0.701,-21.591 h0.71 r180; Mechanical 32 "B10" at -1.699,-29.074 h0.71 r180; Mechanical 32 "E9" at -0.899,-26.39 h0.71 r180; Mechanical 32 "C1" at 5.5,-27.99 h0.71 r180; Mechanical 32 "D6" at 1.501,-27.19 h0.71 r180; Mechanical 32 "D7" at 0.701,-27.19 h0.71 r180; Mechanical 32 "D5" at 2.301,-27.19 h0.71 r180; Mechanical 32 "D3" at 3.9,-27.19 h0.71 r180; Mechanical 32 "C2" at 4.7,-27.99 h0.71 r180; Mechanical 32 "K7" at 0.701,-22.391 h0.71 r180; Mechanical 32 "A6" at 1.501,-29.59 h0.71 r180; Mechanical 32 "G7" at 0.701,-24.791 h0.71 r180; Mechanical 32 "A5" at 2.301,-29.59 h0.71 r180; Mechanical 32 "H7" at 0.701,-23.991 h0.71 r180; Mechanical 32 "B3" at 3.9,-28.79 h0.71 r180; Mechanical 32 "C8" at -0.099,-27.99 h0.71 r180; Mechanical 32 "J7" at 0.701,-23.191 h0.71 r180; Mechanical 32 "J6" at 1.501,-23.191 h0.71 r180; Mechanical 32 "K8" at -0.099,-22.391 h0.71 r180; Mechanical 32 "D4" at 3.1,-27.19 h0.71 r180; Mechanical 32 "D1" at 5.5,-27.19 h0.71 r180; Mechanical 32 "C5" at 2.301,-27.99 h0.71 r180; Mechanical 32 "C4" at 3.1,-27.99 h0.71 r180; Mechanical 32 "D2" at 4.7,-27.19 h0.71 r180; Mechanical 32 "B6" at 1.501,-28.79 h0.71 r180; Mechanical 32 "F6" at 1.501,-25.59 h0.71 r180; Mechanical 32 "E7" at 0.701,-26.39 h0.71 r180; Mechanical 32 "C10" at -1.699,-28.274 h0.71 r180; Mechanical 32 "E8" at -0.099,-26.39 h0.71 r180; Mechanical 32 "B11" at -2.498,-29.074 h0.71 r180; Mechanical 32 "J2" at 4.7,-23.191 h0.71 r180; Mechanical 32 "H2" at 4.7,-23.991 h0.71 r180; Mechanical 32 "G3" at 3.9,-24.791 h0.71 r180; Mechanical 32 "H3" at 3.9,-23.991 h0.71 r180; Mechanical 32 "F9" at -0.899,-25.59 h0.71 r180; Mechanical 32 "H5" at 2.301,-23.991 h0.71 r180; Mechanical 32 "H6" at 1.501,-23.991 h0.71 r180; Mechanical 32 "H8" at -0.099,-23.991 h0.71 r180; Mechanical 32 "K5" at 2.301,-22.391 h0.71 r180; Mechanical 32 "G5" at 2.301,-24.791 h0.71 r180; Mechanical 32 "F7" at 0.701,-25.59 h0.71 r180; Mechanical 32 "K10" at -1.699,-22.675 h0.71 r180; Mechanical 32 "J8" at -0.099,-23.191 h0.71 r180; Mechanical 32 "H10" at -1.699,-24.275 h0.71 r180; Mechanical 32 "G10" at -1.699,-25.075 h0.71 r180; Mechanical 32 "K11" at -2.498,-22.675 h0.71 r180; Mechanical 32 "G9" at -0.899,-24.791 h0.71 r180; Mechanical 32 "J5" at 2.301,-23.191 h0.71 r180; Mechanical 32 "H9" at -0.899,-23.991 h0.71 r180; Mechanical 32 "F10" at -1.699,-25.875 h0.71 r180; Mechanical 32 "J9" at -0.899,-23.191 h0.71 r180; Mechanical 32 "K9" at -0.899,-22.391 h0.71 r180; Mechanical 32 "K6" at 1.501,-22.391 h0.71 r180; Mechanical 32 "G6" at 1.501,-24.791 h0.71 r180; Mechanical 32 "J10" at -1.699,-23.475 h0.71 r180; Mechanical 32 "K1" at 5.5,-22.391 h0.71 r180; Mechanical 32 "F3" at 3.9,-25.59 h0.71 r180; Mechanical 32 "F8" at -0.099,-25.59 h0.71 r180; Mechanical 32 "L10" at -1.699,-21.876 h0.71 r180; Mechanical 32 "G8" at -0.099,-24.791 h0.71 r180; Mechanical 32 "E1" at 5.5,-26.39 h0.71 r180; Mechanical 32 "K2" at 4.7,-22.391 h0.71 r180; Mechanical 32 "F5" at 2.301,-25.59 h0.71 r180; Mechanical 32 "G2" at 4.7,-24.791 h0.71 r180; Mechanical 32 "E5" at 2.301,-26.39 h0.71 r180; Mechanical 32 "E4" at 3.1,-26.39 h0.71 r180; Mechanical 32 "J1" at 5.5,-23.191 h0.71 r180; Mechanical 32 "J3" at 3.9,-23.191 h0.71 r180; Mechanical 32 "F4" at 3.1,-25.59 h0.71 r180; Mechanical 32 "J4" at 3.1,-23.191 h0.71 r180; Mechanical 32 "H11" at -2.498,-24.275 h0.71 r180; Mechanical 32 "L9" at -0.899,-21.591 h0.71 r180; Mechanical 32 "F1" at 5.5,-25.59 h0.71 r180; Mechanical 32 "E3" at 3.9,-26.39 h0.71 r180; Mechanical 32 "F2" at 4.7,-25.59 h0.71 r180; Mechanical 32 "C9" at -0.899,-27.99 h0.71 r180; Mechanical 32 "A11" at -2.498,-29.874 h0.71 r180; Mechanical 32 "D11" at -2.498,-27.475 h0.71 r180; Mechanical 32 "E10" at -1.699,-26.675 h0.71 r180
U4: Top Overlay "*" at 2.211,-33.297 h0.6 r270